# Altium PCB ▒Я┬вкэ░тV2.1(1).PcbDoc
Units mil, origin at the board's own origin, x right, y up, seen from the top; angles counter-clockwise.
Board outline 841.14 x 688.98 mil, 2 copper layers (Top Layer, Bottom Layer); 12 components, 9 nets, 31 pads, 4 vias.
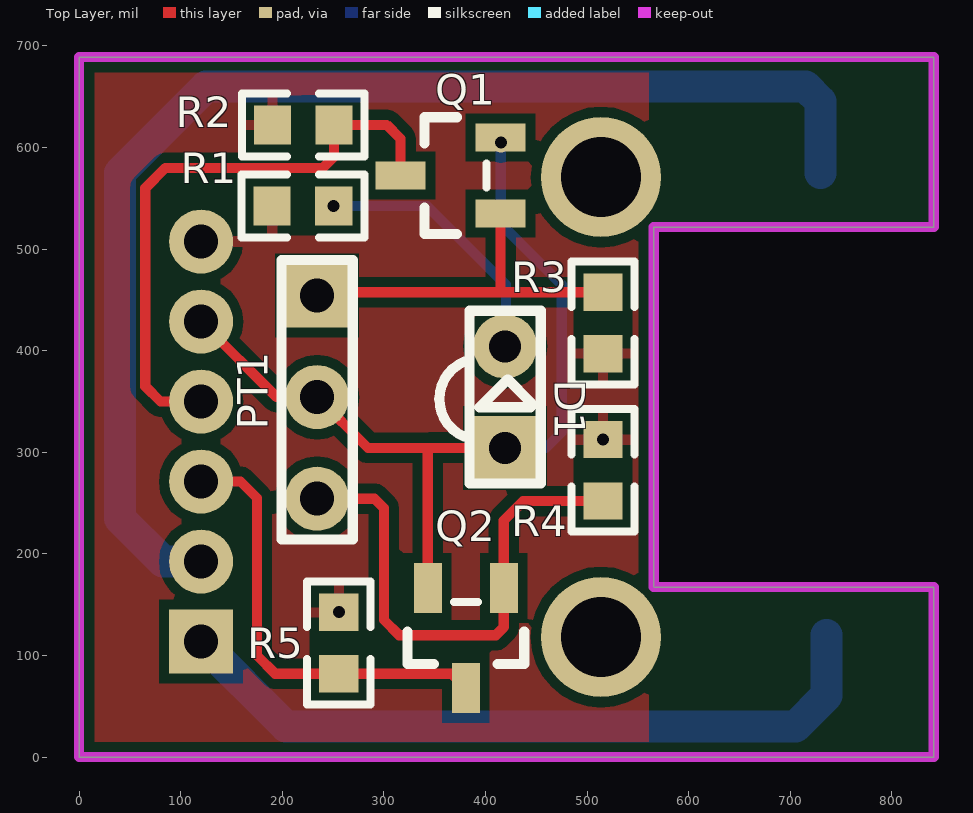
[diagram p0: Top Layer view]
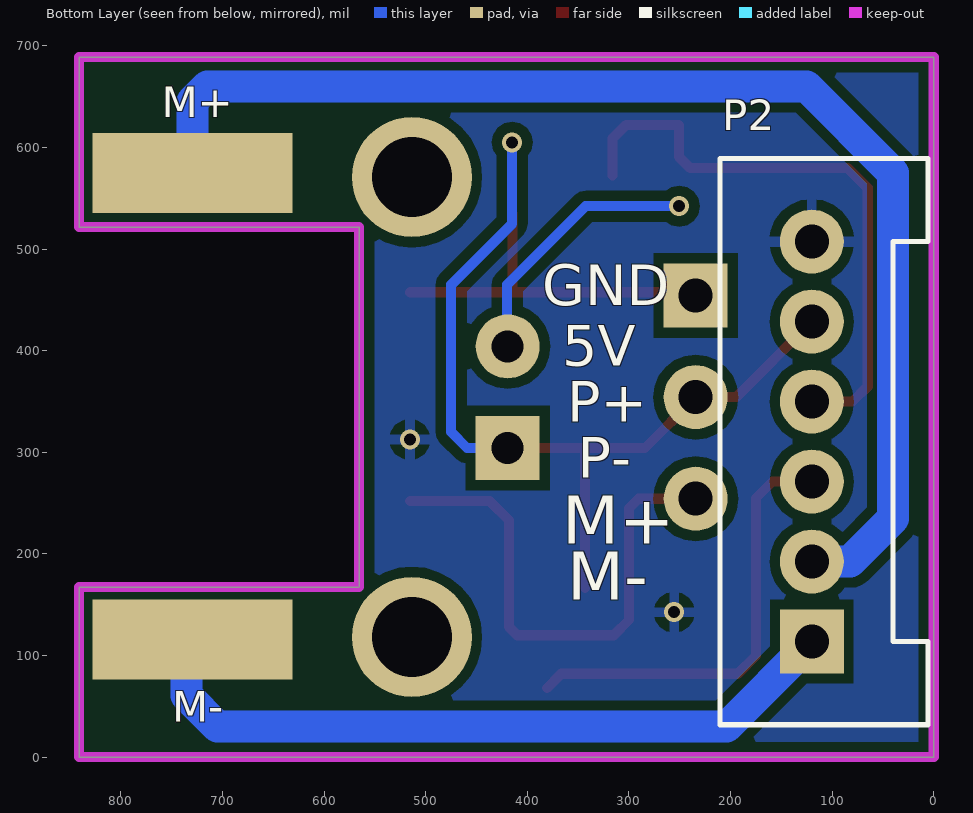
[diagram p1: Bottom Layer view, seen from below]
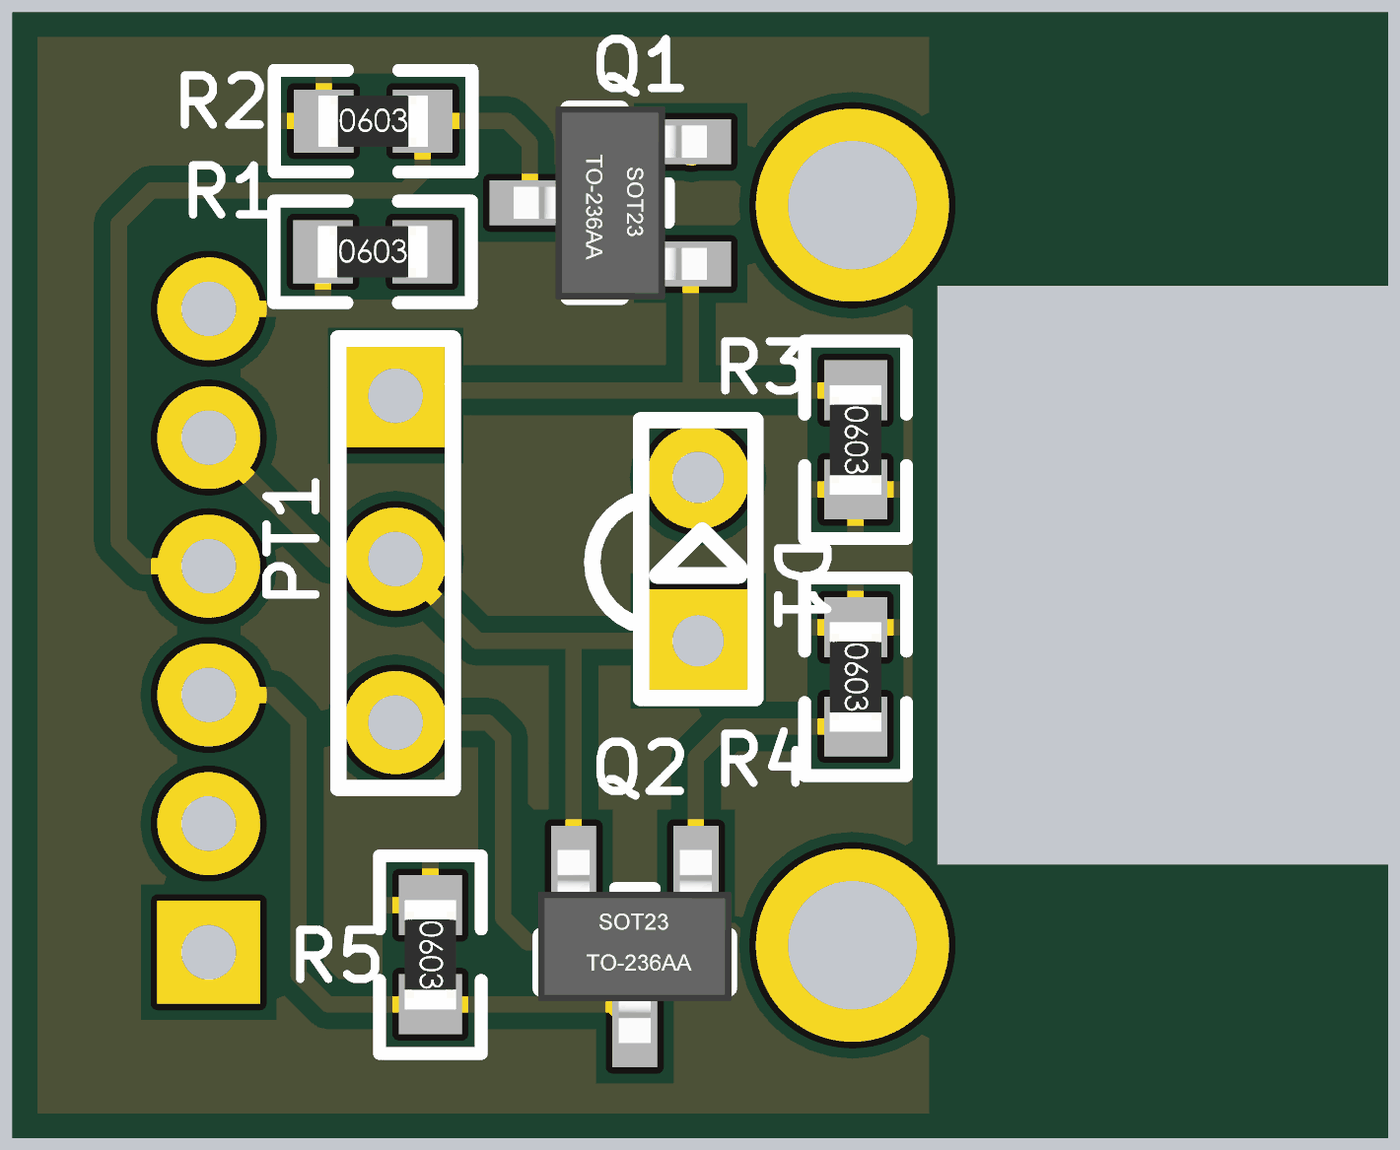
[diagram p2: 3D render of the assembled board from above, using the file's embedded part models]

## Layer stack, top to bottom
Top Layer: signal copper 1.4
Dielectric: dielectric 12.6, FR-4, Dk 4.8
Bottom Layer: signal copper 1.4

## Board outline
0,0 0,688.98 841.14,688.98 841.14,521.65 565.55,521.65 565.55,167.32 841.14,167.32 841.14,0

## Design rules (kind name [scope] priority, off if disabled: settings)
Clearance [All] p1: gap=4
HoleSize [All] p1: absolutevalues=TRUE maxlimit=1181.1 minlimit=1 maxpercent=80.000 minpercent=20.000
HoleToHoleClearance [All] p1: gap=2 allowstackedmicrovias=TRUE
MinimumSolderMaskSliver [All] p1: minsoldermaskwidth=1
PlaneConnect [All] p1: planeconnectstyle=Direct reliefexpansion=20 reliefentries=4 reliefconductorwidth=10 reliefairgap=10
PolygonConnect [All] p1: connectstyle=Relief reliefconductorwidth=10 reliefentries=4 polygonreliefangle="90 Angle" airgapwidth=10
RoutingVias [All] p1: holewidth=28 width=50 viastyle="Through Hole" minholewidth=5 minwidth=10 maxholewidth=300 maxwidth=500
SilkToSilkClearance [All] p1: silktosilkclearance=0
SilkToSolderMaskClearance [IsPad] p1: minsilkscreentomaskgap=0 clearancetoexposedcopper=TRUE
SolderMaskExpansion [All] p1: expansion=4
Width [All] p1: maxlimit=50 minlimit=10 preferedwidth=10
22 further rules are at their usual default settings.

## Components (designator, comment, footprint, x,y, rotation, side; value= is the part's Value field where it differs from the comment)
D1 "D1" IR986 419.29,354.33 r90 top (schematic designator LED)
M+ "hole" pad#1 745,555 r90 bottom (schematic designator p3)
M- "hole" pad#2 729.45,120 r90 bottom (schematic designator p1)
P2 "Header 6" "2.0 XH-6P" 5.83,31.89 r90 bottom
PT1 "PT2559B" PT2559B 234.25,354.33 r270 top (schematic designator *)
Q1 "NPN-PNP" SOT-23(SOT-23-3) 365.55,572.32 r0 top
Q2 "NPN-PNP" SOT-23(SOT-23-3) 380.55,117.32 r90 top
R1 "430R" 0603_R 220.24,542.32 r0 top
R2 "3K" 0603_R 220.55,622.32 r0 top
R3 "6.2K" 0603_R 515.55,427.32 r270 top
R4 "6.2K" 0603_R 515.55,282.32 r270 top
R5 "3K" 0603_R 255.55,112.32 r270 top

## Footprints (in the part's own frame and the unit in brackets; to place one, negate y for a bottom-side part, rotate by r counter-clockwise, add the part's x,y. Pads: shape width x height; smd on the part's side, far side on the other; paste and mask are expansions set on the pad)
"2.0 XH-6P" [mm]
  rect 1.6x1.6 hole 0.85: 1(2.08,2.9)
  round 1.6 hole 0.85 mask+0.102: 2(4.08,2.9) 3(6.08,2.9) 4(8.08,2.9) 5(10.08,2.9) 6(12.08,2.9)
  silkscreen extent 0,0 14.16,5.2
0603_R [mm]
  rect 0.93x0.98 smd: 1(-0.77,0) 2(0.77,0)
  silkscreen extent -1.53,-0.79 1.54,0.79, body extent -0.85,-0.4 0.85,0.4, height 0.56
IR986 [mm]
  rect 1.6x1.6 hole 0.8: 1(-1.27,0)
  round 1.6 hole 0.8: 2(1.27,0)
  silkscreen extent -2.16,-0.89 2.16,1.65
pad#1 [mm]
  rect 2x5 smd: 1(0.508,-0.395)
pad#2 [mm]
  rect 2x5 smd: 1(-0.102,0)
PT2559B [mm]
  rect 1.6x1.6 hole 0.85: 1(-2.54,0)
  round 1.6 hole 0.85: 2(0,0) 3(2.54,0)
  silkscreen extent -3.43,-0.89 3.56,0.89
SOT-23(SOT-23-3) [mm]
  rect 1.25x0.7 smd: 1(1.25,-0.95) 2(1.25,0.95) 3(-1.25,0)
  silkscreen extent -0.65,-1.46 0.9,1.46, body extent -1.5,-1.5 1.5,1.5, height 1.3

## Part data
D1: library part LED
P2: "Header, 6-Pin"
R1 R2 R3 R4 R5: library part Res1, "Resistor"

## Free pads (board coordinates)
  round 118.11 hole 78.74: 0(513.62,118.11) 0(513.62,570.87)

## Via types
v1: diameter 19.68, hole 11.81, Top Layer to Bottom Layer, 4 vias

## Nets (pads, with @x,y where several pads share a name; then routed paths per layer and width w, separated by ;. In a path a pad name is that pad's centre, name@x,y a point inside that pad or via, vN(x,y) a via of type N, cw(c..) or ccw(c..) an arc to the next point about the centre after c; other vN are vias at no path point)
GND: P2.6 R1.1 R2.1 R3.2 R4.1 R5.1
  other v1: 255.55,142.64 515.55,312.64
M+: M+.1 P2.2 | length 1238.8
  Bottom Layer w31.5: P2.2 82.48,192.52 40,235 40,575 125,660 715,660 729.45,645.55 M+.1
M-: M-.1 P2.1 | length 722.4
  Bottom Layer w31.5: P2.1 203.78,30 705,30 735.55,60.55 M-.1@735.55,120
NetD1_2: D1.2 R1.2 | length 261.4
  Bottom Layer w10: v1(250.55,542.32) 342.68,542.32 419.98,465.02 D1.2@419.98,405.02
NetPT1_1: PT1.1 Q1.1 R3.1 | length 360.1
  Top Layer w10: PT1.1 237.56,457.64 415,457.64 ; Q1.1 414.76,457.87 415,457.64 ; R3.1 415,457.64
NetPT1_3: PT1.3 Q2.1 R4.2 | length 517.6
  Top Layer w10: PT1.3 290.67,254.33 300,245 300,135 315,120 410,120 417.95,127.95 Q2.1 417.95,232.95 437.01,252.01 R4.2
P+: P2.4 Q1.3 R2.2 | length 593.8
  Top Layer w10: P2.4 80,350 65,365 65,560 85,580 240,580 250.87,590.87 R2.2 302.68,622.32 316.34,608.66 Q1.3
P-: P2.3 Q2.3 R5.2 | length 435.5
  Top Layer w10: P2.3 158.74,271.26 175,255 175,100 192.99,82.01 R5.2 366.65,82.01 Q2.3
VCC: D1.1 P2.5 PT1.2 Q1.2 Q2.2 | length 860
  Top Layer w10: P2.5 194.41,354.33 PT1.2 284.25,304.33 343.15,304.33 Q2.2 ; 343.82,304.33 D1.1
  Bottom Layer w10: v1(415,605) 415,525 475,465 475,320 459.33,304.33 D1.1

## Polygon pours and split planes (outlines as drawn)
GND on Bottom Layer "Bottom Layer-No Net" (solid, pour order 10): 0.82,690.3 565.82,690.3 570.82,685.3 570.82,1.33 0.82,1.33
no net on Bottom Layer "Bottom Layer-No Net" (solid, pour order 11): 0,688.98
GND on Top Layer "Bottom Layer-No Net" (solid, pour order 8): -4.5,690.69 560.5,690.69 560.5,1.72 -4.5,1.72

## Keep-outs
Keep-Out Layer:
  the board outline again, w10

## Silkscreen, mask and mechanical layers (free items; w line width, h text height)
Bottom Overlay:
  text "GND" at 385.55,445 h40
  text "5V" at 365.55,385 h40
  text "P+" at 360.55,330 h40
  text "P-" at 350.55,275 h40
  text "M+" at 365.55,210 h47.24
  text "M-" at 360.55,155 h47.24